# Altium PCB ESCBackerBoard.PcbDoc
Units mil, origin at the board's own origin, x right, y up, seen from the top; angles counter-clockwise.
Board outline 5889.82 x 3800 mil, 2 copper layers (Top Layer, Bottom Layer); 60 components, 47 nets, 490 pads, 0 vias.
Unrouted connection lines stored in the file: 176.
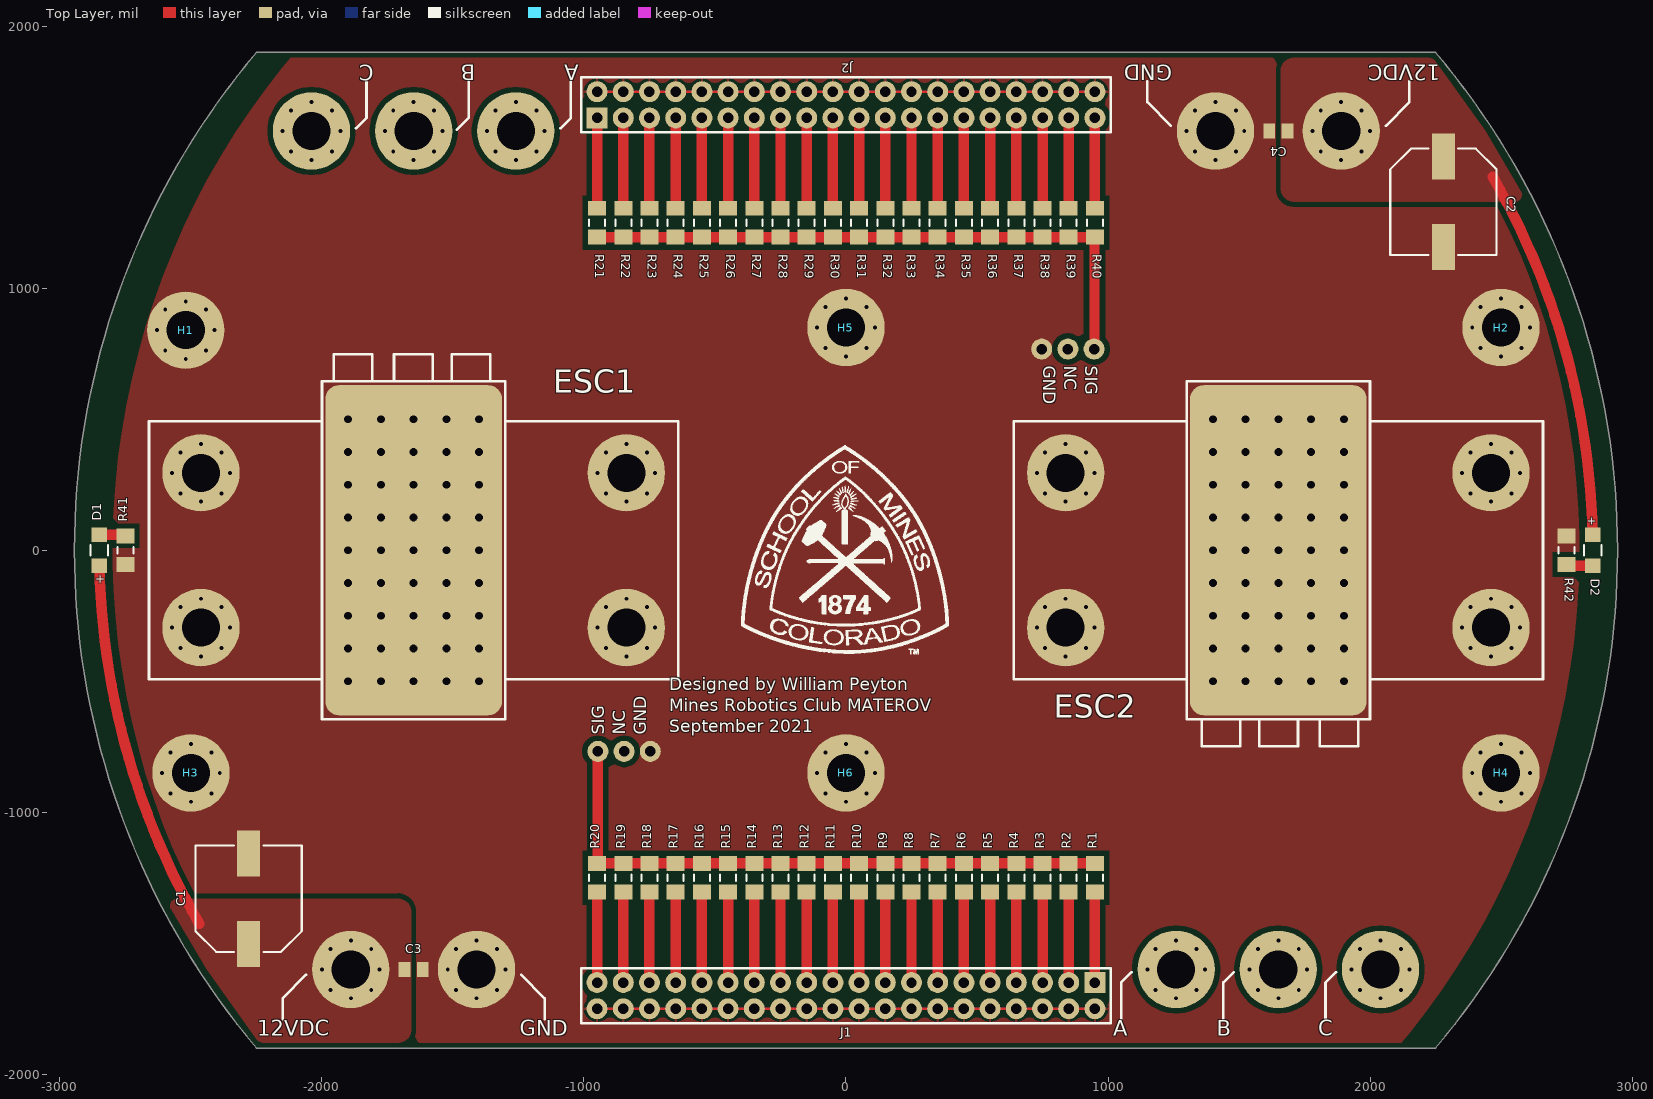
[diagram p0: Top Layer view]
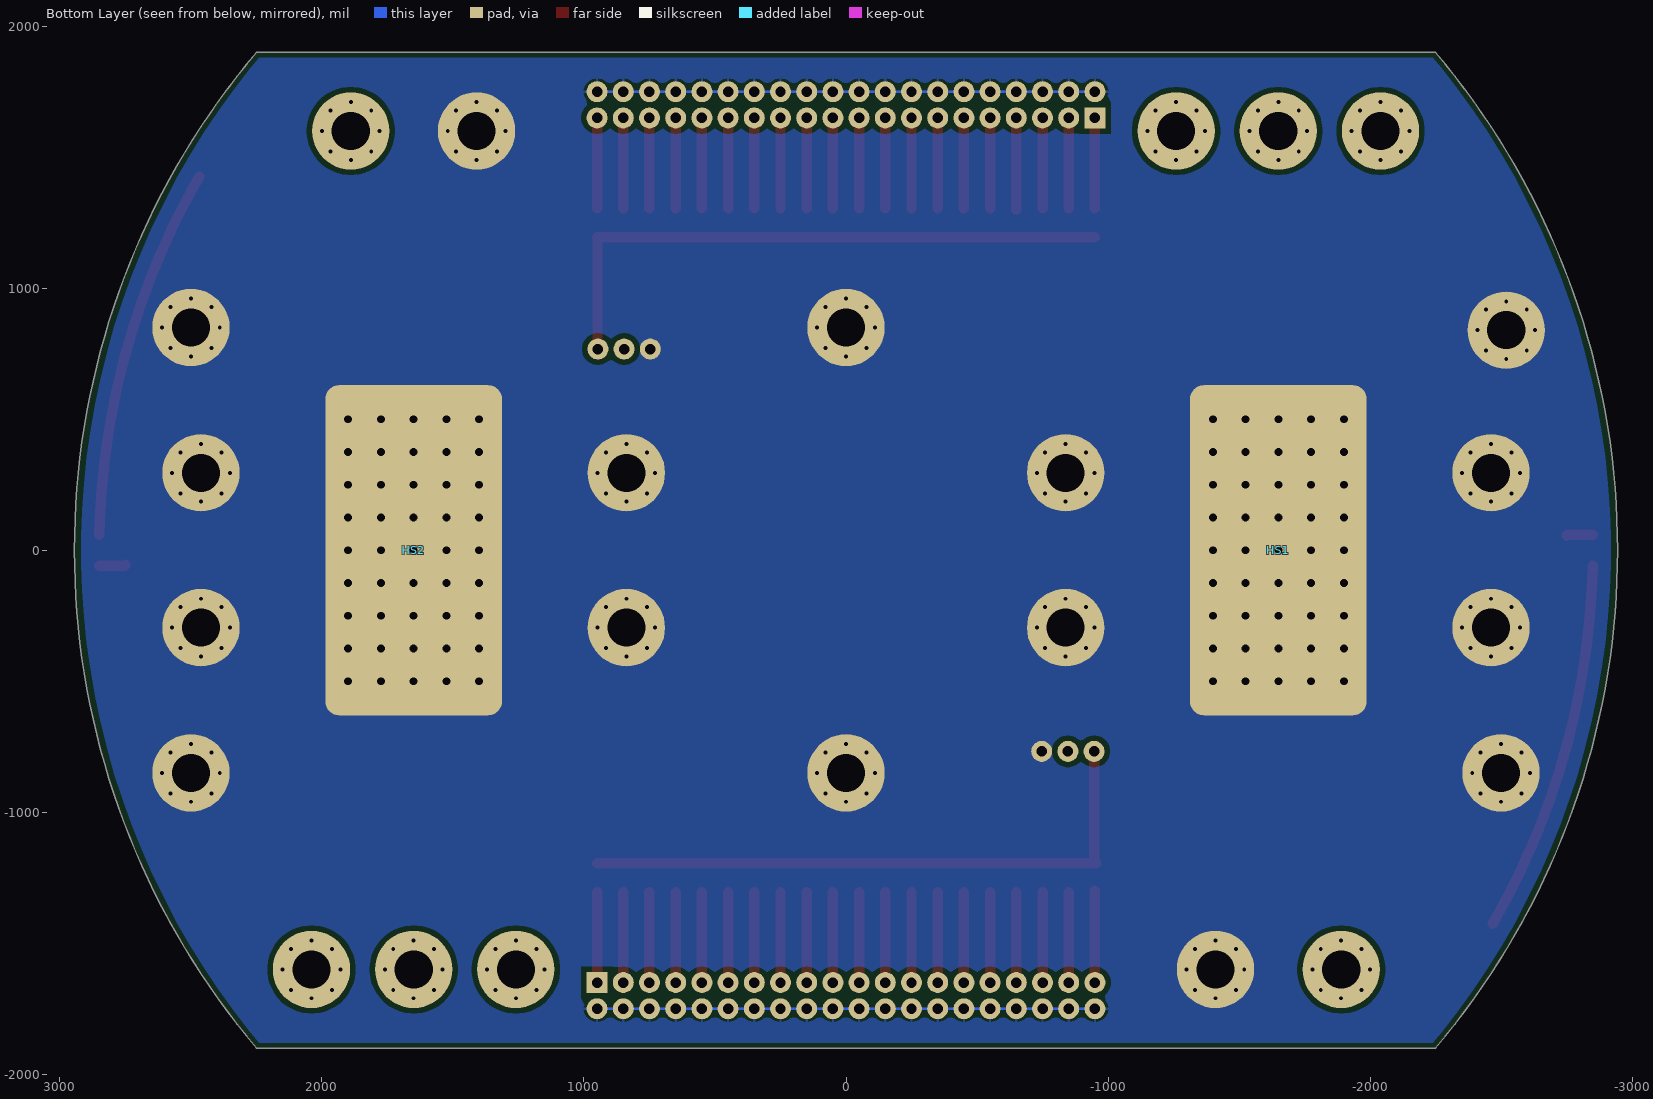
[diagram p1: Bottom Layer view, seen from below]

## Layer stack, top to bottom
Top Solder: solder mask 1, SM-002, Dk 4
Top Layer: signal copper 1.4
Dielectric 1: dielectric 12.6, FR-4, Dk 4.8
Bottom Layer: signal copper 1.4
Bottom Solder: solder mask 1, SM-002, Dk 4

## Board outline
-2250,-1900 cw(c0,0) -2250,1900 2250,1900 cw(c0,0) 2250,-1900

## Design rules (kind name [scope] priority, off if disabled: settings)
Clearance Clearance_9 [All] p1: gap=20 ignorepadtopadclearanceinfootprint=FALSE
Clearance Clearance_8 [All] p2: gap=30 ignorepadtopadclearanceinfootprint=FALSE
Clearance Clearance_7 [All] p3: gap=20 ignorepadtopadclearanceinfootprint=FALSE
Clearance Clearance_6 [InNamedPolygon('TOP_GND') Or InNamedPolygon('BOT_GND')] p4: gap=20 ignorepadtopadclearanceinfootprint=FALSE
Clearance Clearance_5 [InNamedPolygon('TOP_GND') Or InNamedPolygon('BOT_GND')] p5: gap=30 ignorepadtopadclearanceinfootprint=FALSE
Clearance Clearance_4 [All] p6: gap=20 ignorepadtopadclearanceinfootprint=FALSE
Clearance Clearance_3 [InNamedPolygon('BOT_GND')] p7: gap=25 ignorepadtopadclearanceinfootprint=FALSE
Clearance Clearance_2 [InNamedPolygon('BOT_GND')] p8: gap=25 ignorepadtopadclearanceinfootprint=FALSE
Clearance Clearance_1 [InNamedPolygon('BOT_GND')] p9: gap=20 ignorepadtopadclearanceinfootprint=FALSE
Clearance [All] p10: gap=10 ignorepadtopadclearanceinfootprint=FALSE except(0: Arc-Hole Track-Hole SMDPad-Hole THPad-Hole Via-Hole Fill-Hole Poly-Hole Region-Hole Text-Hole)
HoleSize [All] p1: absolutevalues=TRUE maxlimit=150 minlimit=1 maxpercent=80.000 minpercent=20.000
PolygonConnect PolygonConnect_6 [(InComponent('J1') OR InComponent('J2')) vs IsNamedPolygon('TOP_GND') Or IsNamedPolygon('BOT_GND')] p1: connectstyle=Relief reliefconductorwidth=10 reliefentries=4 polygonreliefangle="90 Angle" airgapwidth=10
PolygonConnect PolygonConnect_5 [HasFootprint('S2B-XH-A(LF)(SN)')] p2: connectstyle=Relief reliefconductorwidth=10 reliefentries=4 polygonreliefangle="90 Angle" airgapwidth=10
PolygonConnect PolygonConnect_4 [(InComponent('J1') AND InComponent('J2') AND InComponent('J3')  AND InComponent('J4') AND InComponent('J5')  AND InComponent('J6') AND InComponent('J7') AND InComponent('J8'))] p3: connectstyle=Relief reliefconductorwidth=10 reliefentries=4 polygonreliefangle="90 Angle" airgapwidth=10
PolygonConnect PolygonConnect_3 [All] p4: connectstyle=Direct reliefconductorwidth=10 reliefentries=4 polygonreliefangle="90 Angle" airgapwidth=10
PolygonConnect PolygonConnect_2 [All vs IsNamedPolygon('TOP_GND')] p5: connectstyle=Relief reliefconductorwidth=10 reliefentries=4 polygonreliefangle="90 Angle" airgapwidth=10
PolygonConnect PolygonConnect_1 [All] p6: connectstyle=Direct reliefconductorwidth=10 reliefentries=4 polygonreliefangle="90 Angle" airgapwidth=10
PolygonConnect [All] p7: connectstyle=Relief reliefconductorwidth=10 reliefentries=4 polygonreliefangle="90 Angle" airgapwidth=10
RoutingVias [All] p1: holewidth=28 width=50 viastyle="Through Hole" minholewidth=28 minwidth=50 maxholewidth=28 maxwidth=50
SilkToSolderMaskClearance [IsPad] p1: minsilkscreentomaskgap=7.5 clearancetoexposedcopper=TRUE
SolderMaskExpansion [All] p1: expansion=4 istentingtop=FALSE
Width [All] p1: maxlimit=500 minlimit=10 preferedwidth=10
28 further rules are at their usual default settings.

## Classes and differential pairs
component class U_B2B: J1 J2 R2 R4 R6 R8 R10 R13 R14 R15 R16 R17 R18 R19 R20 R21 R22 R23 R24 R25 R26 R27 R28 R29 R30 R31 R32 R33 R34 R35 R36 R37 R38 R39 R40 R41 R42
component class Top: C1 C2 C3 C4 D1 D2 ESC1 ESC2 H1 H2 H3 H4 H5 H6 HS1 HS2 R41 R42

## Components (designator, comment, footprint, x,y, rotation, side; value= is the part's Value field where it differs from the comment)
C1 "470uF 16V" 875115357006 -2280,-1330 r90 top
C2 "470uF 16V" 875115357006 2280,1330 r270 top
C3 "15uF 35V" "C2012M Generic" -1650,-1600 r0 top
C4 "15uF 35V" "C2012M Generic" 1650,1600 r180 top
D1 "Green, 3.2V" WL-SMCW_1206 -2850,0 r270 top
D2 "Green, 3.2V" WL-SMCW_1206 2850,0 r90 top
ESC1 "7-26V 30A" BasicESC -1650,0 r90 top
ESC2 "7-26V 30A" BasicESC 1650,0 r270 top
H1 "M3" M3_MOUNTING_HOLE -2520,840 r0 top
H2 "M3" M3_MOUNTING_HOLE 2500,850 r0 top
H3 "M3" M3_MOUNTING_HOLE -2500,-850 r0 top
H4 "M3" M3_MOUNTING_HOLE 2500,-850 r0 top
H5 "M3" M3_MOUNTING_HOLE 0,850 r0 top
H6 "M3" M3_MOUNTING_HOLE 0,-850 r0 top
HS1 "1.25\"x0.53\"x0.19\"" 508500B00000G -1650,0 r180 bottom
HS2 "1.25\"x0.53\"x0.19\"" 508500B00000G 1650,0 r180 bottom
J1 "2x20pos, 0.1\"" 1979 950,-1650 r180 top
J2 "2x20pos, 0.1\"" 1979 -950,1650 r0 top
R1 "0Ω" RMCF1206 950,-1250 r270 top
R2 "0Ω" RMCF1206 850,-1250 r270 top
R3 "0Ω" RMCF1206 750,-1250 r270 top
R4 "0Ω" RMCF1206 650,-1250 r270 top
R5 "0Ω" RMCF1206 550,-1250 r270 top
R6 "0Ω" RMCF1206 450,-1250 r270 top
R7 "0Ω" RMCF1206 350,-1250 r270 top
R8 "0Ω" RMCF1206 250,-1250 r270 top
R9 "0Ω" RMCF1206 150,-1250 r270 top
R10 "0Ω" RMCF1206 50,-1250 r270 top
R11 "0Ω" RMCF1206 -50,-1250 r270 top
R12 "0Ω" RMCF1206 -150,-1250 r270 top
R13 "0Ω" RMCF1206 -250,-1250 r270 top
R14 "0Ω" RMCF1206 -350,-1250 r270 top
R15 "0Ω" RMCF1206 -450,-1250 r270 top
R16 "0Ω" RMCF1206 -550,-1250 r270 top
R17 "0Ω" RMCF1206 -650,-1250 r270 top
R18 "0Ω" RMCF1206 -750,-1250 r270 top
R19 "0Ω" RMCF1206 -850,-1250 r270 top
R20 "0Ω" RMCF1206 -950,-1250 r270 top
R21 "0Ω" RMCF1206 -950,1250 r90 top
R22 "0Ω" RMCF1206 -850,1250 r90 top
R23 "0Ω" RMCF1206 -750,1250 r90 top
R24 "0Ω" RMCF1206 -650,1250 r90 top
R25 "0Ω" RMCF1206 -550,1250 r90 top
R26 "0Ω" RMCF1206 -450,1250 r90 top
R27 "0Ω" RMCF1206 -350,1250 r90 top
R28 "0Ω" RMCF1206 -250,1250 r90 top
R29 "0Ω" RMCF1206 -150,1250 r90 top
R30 "0Ω" RMCF1206 -50,1250 r90 top
R31 "0Ω" RMCF1206 50,1250 r90 top
R32 "0Ω" RMCF1206 150,1250 r90 top
R33 "0Ω" RMCF1206 250,1250 r90 top
R34 "0Ω" RMCF1206 350,1250 r90 top
R35 "0Ω" RMCF1206 450,1250 r90 top
R36 "0Ω" RMCF1206 550,1250 r90 top
R37 "0Ω" RMCF1206 650,1250 r90 top
R38 "0Ω" RMCF1206 750,1250 r90 top
R39 "0Ω" RMCF1206 850,1250 r90 top
R40 "0Ω" RMCF1206 950,1250 r90 top
R41 "470Ω" RMCF1206 -2750,0 r90 top
R42 "470Ω" RMCF1206 2750,0 r270 top

## Footprints (in the part's own frame and the unit in brackets; to place one, negate y for a bottom-side part, rotate by r counter-clockwise, add the part's x,y. Pads: shape width x height; smd on the part's side, far side on the other; paste and mask are expansions set on the pad)
1979 [mil] "Adafruit STACKING HEADER RASPBERRY PI"
  rect 80x80 hole 40: 1(0,0)
  round 80 hole 40: 2(0,100) 3(100,0) 4(100,100) 5(200,0) 6(200,100) 7(300,0) 8(300,100) 9(400,0) 10(400,100) 11(500,0) 12(500,100) 13(600,0) 14(600,100) 15(700,0) 16(700,100) 17(800,0) 18(800,100) 19(900,0) 20(900,100) 21(1000,0) 22(1000,100) 23(1100,0) 24(1100,100) 25(1200,0) 26(1200,100) 27(1300,0) 28(1300,100) 29(1400,0) 30(1400,100) 31(1500,0) 32(1500,100) 33(1600,0) 34(1600,100) 35(1700,0) 36(1700,100) 37(1800,0) 38(1800,100) 39(1900,0) 40(1900,100)
  silkscreen extent -60,-55 1960,155, body extent -60,-50 1960,160, height 435
508500B00000G [mil]
  body extent -265,-625 265,625, height 190
875115357006 [mm] "Wurth CAP ALUM POLY 470UF 20% 16V SMD"
  rect 4.45x2.25 smd: 1(-4.375,0) 2(4.375,0)
  silkscreen extent -5.15,-5.15 5.15,5.15, body extent -5.5,-5.15 5.5,5.15, height 10.5
BasicESC [mil]
  round 80 hole 40: 2(-767.72,-803.15) GND(-767.72,-903.15) SIG(-767.72,-703.15)
  round 30 hole 15 paste+0 mask+0: A(1490,-390) A(1522,-468) A(1522,-312) A(1600,-500) A(1600,-280) A(1678,-468) A(1678,-312) A(1710,-390) B(1490,0) B(1522,-78) B(1522,78) B(1600,-110) B(1600,110) B(1678,-78) B(1678,78) B(1710,0) C(1490,390) C(1522,312) C(1522,468) C(1600,280) C(1600,500) C(1678,312) C(1678,468) C(1710,390) GND(-1710,-240) GND(-1678,-318) GND(-1678,-162) GND(-1600,-350) GND(-1600,-130) GND(-1522,-318) GND(-1522,-162) GND(-1490,-240) GND(-405.28,811.81) GND(-405.28,-811.81) GND(-373.28,733.81) GND(-373.28,889.81) GND(-373.28,-889.81) GND(-373.28,-733.81) GND(-295.28,701.81) GND(-295.28,921.81) GND(-295.28,-921.81) GND(-295.28,-701.81) GND(-217.28,733.81) GND(-217.28,889.81) GND(-217.28,-889.81) GND(-217.28,-733.81) GND(-185.28,811.81) GND(-185.28,-811.81) GND(185.28,811.81) GND(185.28,-811.81) GND(217.28,733.81) GND(217.28,889.81) GND(217.28,-889.81) GND(217.28,-733.81) GND(295.28,701.81) GND(295.28,921.81) GND(295.28,-921.81) GND(295.28,-701.81) GND(373.28,733.81) GND(373.28,889.81) GND(373.28,-889.81) GND(373.28,-733.81) GND(405.28,811.81) GND(405.28,-811.81) VIN(-1710,240) VIN(-1678,162) VIN(-1678,318) VIN(-1600,130) VIN(-1600,350) VIN(-1522,162) VIN(-1522,318) VIN(-1490,240)
  round 295.28 hole 145.67: A(1600,-390) B(1600,0) C(1600,390) GND(-1600,-240) GND(-295.28,811.81) GND(-295.28,-811.81) GND(295.28,811.81) GND(295.28,-811.81) VIN(-1600,240)
  round 60 hole 30 paste+0 mask+0: GND(-500,-250) GND(-500,-125) GND(-500,0) GND(-500,125) GND(-500,250) GND(-375,-250) GND(-375,-125) GND(-375,0) GND(-375,125) GND(-375,250) GND(-250,250) GND(-250,-125) GND(-250,0) GND(-250,125) GND(-250,-250) GND(-125,125) GND(-125,250) GND(-125,0) GND(-125,-250) GND(-125,-125) GND(0,250) GND(0,125) GND(0,0) GND(0,-125) GND(0,-250) GND(125,125) GND(125,250) GND(125,0) GND(125,-250) GND(125,-125) GND(250,250) GND(250,-125) GND(250,0) GND(250,125) GND(250,-250) GND(375,-250) GND(375,-125) GND(375,0) GND(375,125) GND(375,250) GND(500,-250) GND(500,-125) GND(500,0) GND(500,125) GND(500,250)
  rrect15% 1259.84x673.23 all layers, no hole: GND(0,0)
  silkscreen extent -645,-1010 748,1010, body extent -1929,-1008 1929,1009, height 391
"C2012M Generic" [mm] "TDK Chip Ceramic Capacitor 2012M Generic"
  rect 1.15x1.45 smd: 1(-0.875,0) 2(0.875,0)
  body extent -1.1,-0.72 1.1,0.72, height 1.45
M3_MOUNTING_HOLE [mil] "MECHANICAL M3 MOUNTING HOLE"
  round 30 hole 15 paste+0 mask+0: 1(-110,0) 1(-78,-78) 1(-78,78) 1(0,-110) 1(0,110) 1(78,-78) 1(78,78) 1(110,0)
  round 295.28 hole 145.67: 1(0,0)
RMCF1206 [mm]
  rect 1.45x1.75 smd: 1(-1.4,0) 2(1.4,0)
  silkscreen extent -0.3,-0.77 0.3,0.77, body extent -1.78,-0.87 1.78,0.87, height 0.7
WL-SMCW_1206 [mm] "SMD Mono-color Chip LED, body 3.2x1.6mm"
  rect 1.4x1.5 smd: 1(-1.5,0) 2(1.5,0)
  silkscreen extent -0.5,-0.85 0.5,0.85, body extent -1.6,-0.8 1.6,0.8, height 0.68

## Part data
C1 C2: library part 875115357006, "Wurth CAP ALUM POLY 470UF 20% 16V SMD", Manufacturer="Würth Elektronik", ComponentLink1Description=DigiKey, ComponentLink1URL=https://www.digikey.com/en/products/detail/w%C3%BCrth-elektronik/875115357006/5147625?s=N4IgTCBcDaIBwHYCsBGFSDMSEAYcDYQBdAXyA, Part Number=875115357006
C3 C4: library part C2012X5R1V156M125AC, "TDK CAP CER 15UF 35V X5R 0805", Manufacturer="TDK Corporation", ComponentLink1Description="New link", Part Number=C2012X5R1V156M125AC
D1 D2: library part 150120GS75000, "WL-SMCW SMT Mono-color Chip LED Waterclear, size 1206, Green, 3.2V, 140deg", Emitting Color=Green, Forward Voltage typ.=3.2V, Operating Temperature="-40 to +85degC", Chip Technology=InGaN, ComponentLink1Description=Manufacturer, ComponentLink1URL=http://www.we-online.de, ComponentLink2Description=Datasheet, ComponentLink2URL=https://www.we-online.com/catalog/datasheet/150120GS75000.pdf, Dominant Wavelength typ.=525nm, Luminous Intensity typ.=450mcd, Mounting Technology=SMT, Packaging="Tape and Reel", Part Number=150120GS75000, Peak Wavelength typ.=515nm, Published Date="December 2019", Publisher="Wurth Elektronik", Size=1206, Viewing Angle=140deg
ESC1 ESC2: library part BasicESC, "Blue Robotics BasicESC", Manufacturer="Blue Robotics", ComponentLink1Description="Blue Robotics", ComponentLink1URL=https://bluerobotics.com/store/thrusters/speed-controllers/besc30-r3/
H1 H2 H3 H4 H5 H6: library part M3_Mounting_Hole, "MECHANICAL M3 Mounting Hole"
HS1 HS2: library part 508500B00000G, "AAVID HEATSINK 24-PIN DIP GLUE-ON BLK", Manufacturer="Aavid, Thermal Division of Boyd Corporation", ComponentLink1Description=DigiKey, ComponentLink1URL=https://www.digikey.com/en/products/detail/aavid-thermal-division-of-boyd-corporation/508500B00000G/373762, Part Number=508500B00000G
J1 J2: library part 1979, "Adafruit STACKING HEADER RASPBERRY PI", Manufacturer=Adafruit, ComponentLink1Description=DigiKey, ComponentLink1URL=https://www.digikey.com/en/products/detail/adafruit-industries-llc/1979/6238003?utm_adgroup=Accessories&utm_source=google&utm_medium=cpc&utm_campaign=Shopping_Product_Development%20Boards%2C%20Kits%2C%20Programmers_NEW&utm_term=&utm_content=Accessories&gclid=CjwKCAjwzruGBhBAEiwAUqMR8EJmk7tgiLxUlbO6Gr5x5WmlUK_tnBqJhDCD_TRLtZ5IBbXMVM3f2xoCyKwQAvD_BwE, Part Number=1979
R1 R2 R3 R4 R5 R6 R7 R8 R9 R10 R11 R12 R13 R14 R15 R16 R17 R18 R19 R20 R21 R22 R23 R24 R25 R26 R27 R28 R29 R30 R31 R32 R33 R34 R35 R36 R37 R38 R39 R40: library part RMCF1206ZT0R00, "Stackpole RES 0 OHM 1/4W 1206", Manufacturer="Stackpole Electronics Inc", ComponentLink1Description=DigiKey, ComponentLink1URL=https://www.digikey.com/en/products/detail/stackpole-electronics-inc/RMCF1206ZT0R00/1756906, Part Number=RMCF1206ZT0R00
R41 R42: library part RMCF1206JT470R, "Stackpole RES 470 OHM 5% 1/4W 1206", Manufacturer="Stackpole Electronics Inc", ComponentLink1Description=DigiKey, ComponentLink1URL=https://www.digikey.com/en/products/detail/stackpole-electronics-inc/RMCF1206JT470R/1753845, Part Number=RMCF1206JT470R

## Nets (pads, with @x,y where several pads share a name; then routed paths per layer and width w, separated by ;. In a path a pad name is that pad's centre, name@x,y a point inside that pad or via, vN(x,y) a via of type N, cw(c..) or ccw(c..) an arc to the next point about the centre after c; other vN are vias at no path point)
ESC1_SIG: ESC1.SIG R1.1 R2.1 R3.1 R4.1 R5.1 R6.1 R7.1 R8.1 R9.1 R10.1 R11.1 R12.1 R13.1 R14.1 R15.1 R16.1 R17.1 R18.1 R19.1 R20.1 | length 2336.6
  Top Layer w40: R20.1@-955.91,-1194.88 R20.1@-955.39,-1194.88 ; ESC1.SIG -946.85,-1186.34 R20.1@-955.39,-1194.88 ; R1.1 R2.1 R3.1 R4.1 R5.1 R6.1 R7.1 R8.1 R9.1 R10.1 R11.1 R12.1 R13.1 R14.1 R15.1 R16.1 R17.1 R18.1 R19.1 R20.1 R20.1@-955.39,-1194.88
ESC2_SIG: ESC2.SIG R21.1 R22.1 R23.1 R24.1 R25.1 R26.1 R27.1 R28.1 R29.1 R30.1 R31.1 R32.1 R33.1 R34.1 R35.1 R36.1 R37.1 R38.1 R39.1 R40.1 | length 2328.5
  Top Layer w40: R21.1 R22.1 R25.1 R26.1 R27.1 R28.1 R29.1 R30.1 R31.1 R32.1 R33.1 R34.1 R35.1 R36.1 R37.1 R38.1 R39.1 R40.1 948.43,1193.31 948.43,769.29 ESC2.SIG
GND: C1.2 C2.2 C3.2 C4.2 ESC1.GND ESC2.GND H1.1 H2.1 H3.1 H4.1 H5.1 H6.1 J1.2 J1.4 J1.6 J1.8 J1.10 J1.12 J1.14 J1.16 J1.18 J1.20 J1.22 J1.24 J1.26 J1.28 J1.30 J1.32 J1.34 J1.36 J1.38 J1.40 J2.2 J2.4 J2.6 J2.8 J2.10 J2.12 J2.14 J2.16 J2.18 J2.20 J2.22 J2.24 J2.26 J2.28 J2.30 J2.32 J2.34 J2.36 J2.38 J2.40 R41.1 R42.1 | length 7600
  Top Layer w10: J1.40 J1.38 J1.36 J1.34 J1.32 J1.30 J1.28 J1.26 J1.24 J1.22 J1.20 J1.18 J1.16 J1.14 J1.12 J1.10 J1.8 J1.6 J1.4 J1.2 ; J2.2 J2.4 J2.6 J2.8 J2.10 J2.12 J2.14 J2.16 J2.18 J2.20 J2.22 J2.24 J2.26 J2.28 J2.30 J2.32 J2.34 J2.36 J2.38 J2.40
  Bottom Layer w10: J1.40 J1.38 J1.36 J1.34 J1.32 J1.30 J1.28 J1.26 J1.24 J1.22 J1.20 J1.18 J1.16 J1.14 J1.12 J1.10 J1.8 J1.6 J1.4 J1.2 ; J2.2 J2.4 J2.6 J2.8 J2.10 J2.12 J2.14 J2.16 J2.18 J2.20 J2.22 J2.24 J2.26 J2.28 J2.30 J2.32 J2.34 J2.36 J2.38 J2.40
NetC1_1: C1.1 C3.1 D1.2 ESC1.VIN | length 1432.6
  Top Layer w40: D1.2@-2849.37,-59.69 ccw(c0,0) -2468.17,-1425
NetC2_1: C2.1 C4.1 D2.2 ESC2.VIN | length 1432.6
  Top Layer w40: 2468.17,1425 cw(c0,0) D2.2@2849.37,59.69
NetD1_1: D1.1 R41.2 | length 101.1
  Top Layer w40: D1.1 -2759.5,59.06 cw(c-2759.5,45.61) R41.2
NetD2_1: D2.1 R42.2 | length 101.1
  Top Layer w40: R42.2 ccw(c2759.5,-45.61) 2759.5,-59.06 D2.1
NetJ1_1: J1.1 R1.2 | length 344.9
  Top Layer w40: J1.1 R1.2
NetJ1_3: J1.3 R2.2 | length 344.9
  Top Layer w40: J1.3 R2.2
NetJ1_5: J1.5 R3.2 | length 344.9
  Top Layer w40: J1.5 R3.2
NetJ1_7: J1.7 R4.2 | length 344.9
  Top Layer w40: J1.7 R4.2
NetJ1_9: J1.9 R5.2 | length 344.9
  Top Layer w40: J1.9 R5.2
NetJ1_11: J1.11 R6.2 | length 344.9
  Top Layer w40: J1.11 R6.2
NetJ1_13: J1.13 R7.2 | length 344.9
  Top Layer w40: J1.13 R7.2
NetJ1_15: J1.15 R8.2 | length 344.9
  Top Layer w40: J1.15 R8.2
NetJ1_17: J1.17 R9.2 | length 344.9
  Top Layer w40: J1.17 R9.2
NetJ1_19: J1.19 R10.2 | length 344.9
  Top Layer w40: J1.19 R10.2
NetJ1_21: J1.21 R11.2 | length 344.9
  Top Layer w40: J1.21 R11.2
NetJ1_23: J1.23 R12.2 | length 344.9
  Top Layer w40: J1.23 R12.2
NetJ1_25: J1.25 R13.2 | length 344.9
  Top Layer w40: J1.25 R13.2
NetJ1_27: J1.27 R14.2 | length 344.9
  Top Layer w40: J1.27 R14.2
NetJ1_29: J1.29 R15.2 | length 344.9
  Top Layer w40: J1.29 R15.2
NetJ1_31: J1.31 R16.2 | length 344.9
  Top Layer w40: J1.31 R16.2
NetJ1_33: J1.33 R17.2 | length 344.9
  Top Layer w40: J1.33 R17.2
NetJ1_35: J1.35 R18.2 | length 344.9
  Top Layer w40: J1.35 R18.2
NetJ1_37: J1.37 R19.2 | length 344.9
  Top Layer w40: J1.37 R19.2
NetJ1_39: J1.39 R20.2 | length 350
  Top Layer w40: J1.39 R20.2 R20.2@-950,-1300
NetJ2_1: J2.1 R21.2 | length 344.9
  Top Layer w40: R21.2 J2.1
NetJ2_3: J2.3 R22.2 | length 344.9
  Top Layer w40: R22.2 J2.3
NetJ2_5: J2.5 R23.2 | length 344.9
  Top Layer w40: R23.2 J2.5
NetJ2_7: J2.7 R24.2 | length 350
  Top Layer w40: R24.2@-650,1300 R24.2 J2.7
NetJ2_9: J2.9 R25.2 | length 344.9
  Top Layer w40: R25.2 J2.9
NetJ2_11: J2.11 R26.2 | length 344.9
  Top Layer w40: R26.2 J2.11
NetJ2_13: J2.13 R27.2 | length 344.9
  Top Layer w40: R27.2 J2.13
NetJ2_15: J2.15 R28.2 | length 344.9
  Top Layer w40: R28.2 J2.15
NetJ2_17: J2.17 R29.2 | length 344.9
  Top Layer w40: R29.2 J2.17
NetJ2_19: J2.19 R30.2 | length 344.9
  Top Layer w40: R30.2 J2.19
NetJ2_21: J2.21 R31.2 | length 344.9
  Top Layer w40: R31.2 J2.21
NetJ2_23: J2.23 R32.2 | length 344.9
  Top Layer w40: R32.2 J2.23
NetJ2_25: J2.25 R33.2 | length 344.9
  Top Layer w40: R33.2 J2.25
NetJ2_27: J2.27 R34.2 | length 344.9
  Top Layer w40: R34.2 J2.27
NetJ2_29: J2.29 R35.2 | length 344.9
  Top Layer w40: R35.2 J2.29
NetJ2_31: J2.31 R36.2 | length 344.9
  Top Layer w40: R36.2 J2.31
NetJ2_33: J2.33 R37.2 | length 344.9
  Top Layer w40: R37.2 J2.33
NetJ2_35: J2.35 R38.2 | length 344.9
  Top Layer w40: R38.2 J2.35
NetJ2_37: J2.37 R39.2 | length 344.9
  Top Layer w40: R39.2 J2.37
NetJ2_39: J2.39 R40.2 | length 344.9
  Top Layer w40: R40.2 J2.39
pads on no net: ESC1.2 ESC1.A ESC1.B ESC1.C ESC2.2 ESC2.A ESC2.B ESC2.C

## Polygon pours and split planes (outlines as drawn)
GND on Top Layer "TOP_GND" (solid, pour order 3): -2120,-1880 cw(c146.74,0) -2120,1880 2120,1880 cw(c-146.73,0) 2120,-1880
NetC2_1 on Top Layer "TOP_VIN2" (solid, pour order 0): 1660,1830 1660,1380 ccw(c1710,1380) 1710,1330 2552.91,1330 ccw(c2552.9,1356.83) 2575.99,1370.51 2440,1600 2251.29,1864.19 ccw(c2220.57,1842.25) 2220.57,1880 1710,1880 ccw(c1710,1830)
NetC1_1 on Top Layer "TOP_VIN1" (solid, pour order 2): -1660,-1830 -1660,-1380 ccw(c-1710,-1380) -1710,-1330 -2552.91,-1330 ccw(c-2552.91,-1356.83) -2575.99,-1370.51 -2440,-1600 -2251.29,-1864.19 ccw(c-2220.57,-1842.24) -2220.57,-1880 -1710,-1880 ccw(c-1710,-1830)
GND on Bottom Layer "BOT_GND" (solid, pour order 1): -2240,-1880 cw(c26.74,0) -2240,1880 2240,1880 cw(c-26.73,0) 2240,-1880

## Silkscreen, mask and mechanical layers (free items; w line width, h text height)
Top Overlay:
  drawing of 71 lines, arcs and shapes, not listed
  text "C" at -1801.73,1871.99 h100 r180
  text "B" at -1415.88,1871.97 h100 r180
  text "A" at -1020.09,1871.97 h100 r180
  text "GND" at 1244.48,1871.99 h100 r180
  text "12VDC" at 2267.33,1871.99 h100 r180
  text "SIG / NC / GND" at 737.88,704.63 h80 r270
  text "SIG / NC / GND" at -747.88,-704.63 h80 r90
  text "Designed by William Peyton / Mines Robotics Club MATEROV / September 2021" at -675,-710 h80
  text "12VDC" at -2247.33,-1871.99 h100
  text "GND" at -1244.48,-1871.99 h100
  text "A" at 1020.09,-1871.97 h100
  text "B" at 1415.88,-1871.97 h100
  text "C" at 1801.73,-1871.99 h100
Mechanical 1:
  the board outline again, w10
Mechanical 13:
  circle w10: c0,0 r3250
  circle w10: c0,0 r3875

## Text inside footprints (layer, text, board x,y; h text height)
D1: Top Overlay "+" at -2863.78,-124.02 h30
D2: Top Overlay "+" at 2863.78,124.02 h30 r180